# Altium PCB USB_Serial_Interface.PcbDoc
Units mm, origin at the board's own origin, x right, y up, seen from the top; angles counter-clockwise.
Board outline 45.7 x 28.37 mm, 2 copper layers (Top Layer, Bottom Layer); 35 components, 26 nets, 117 pads, 23 vias.
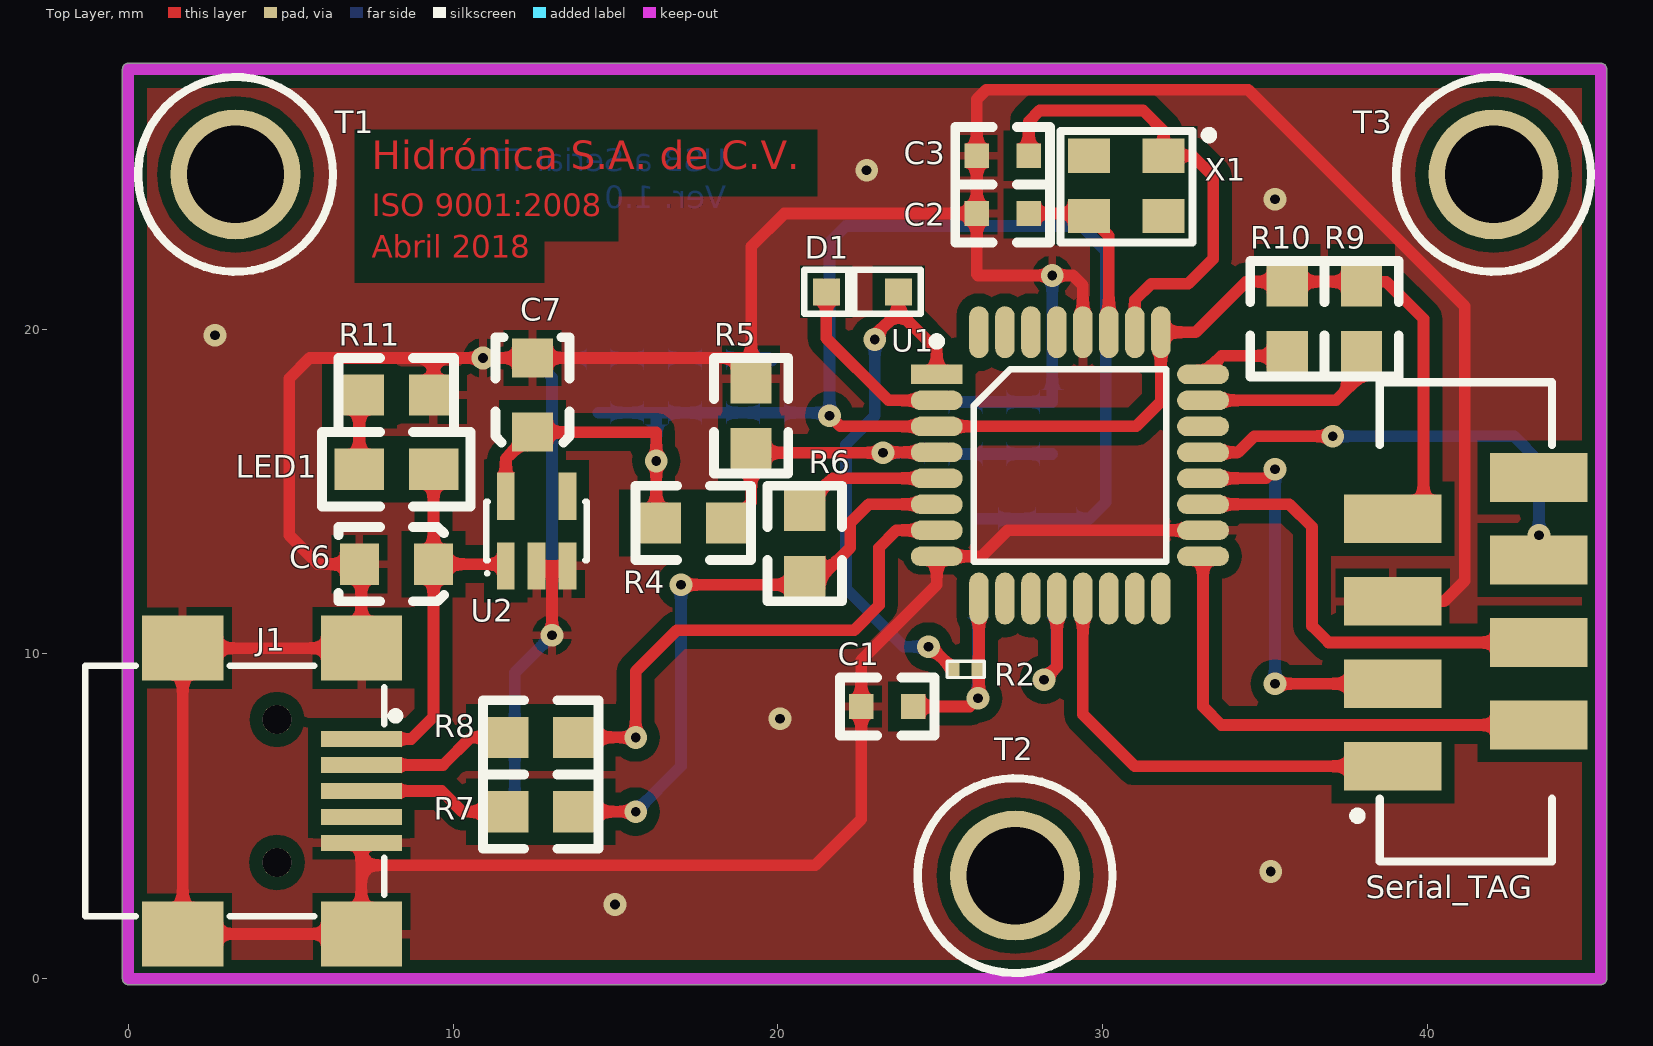
[diagram p0: Top Layer view]
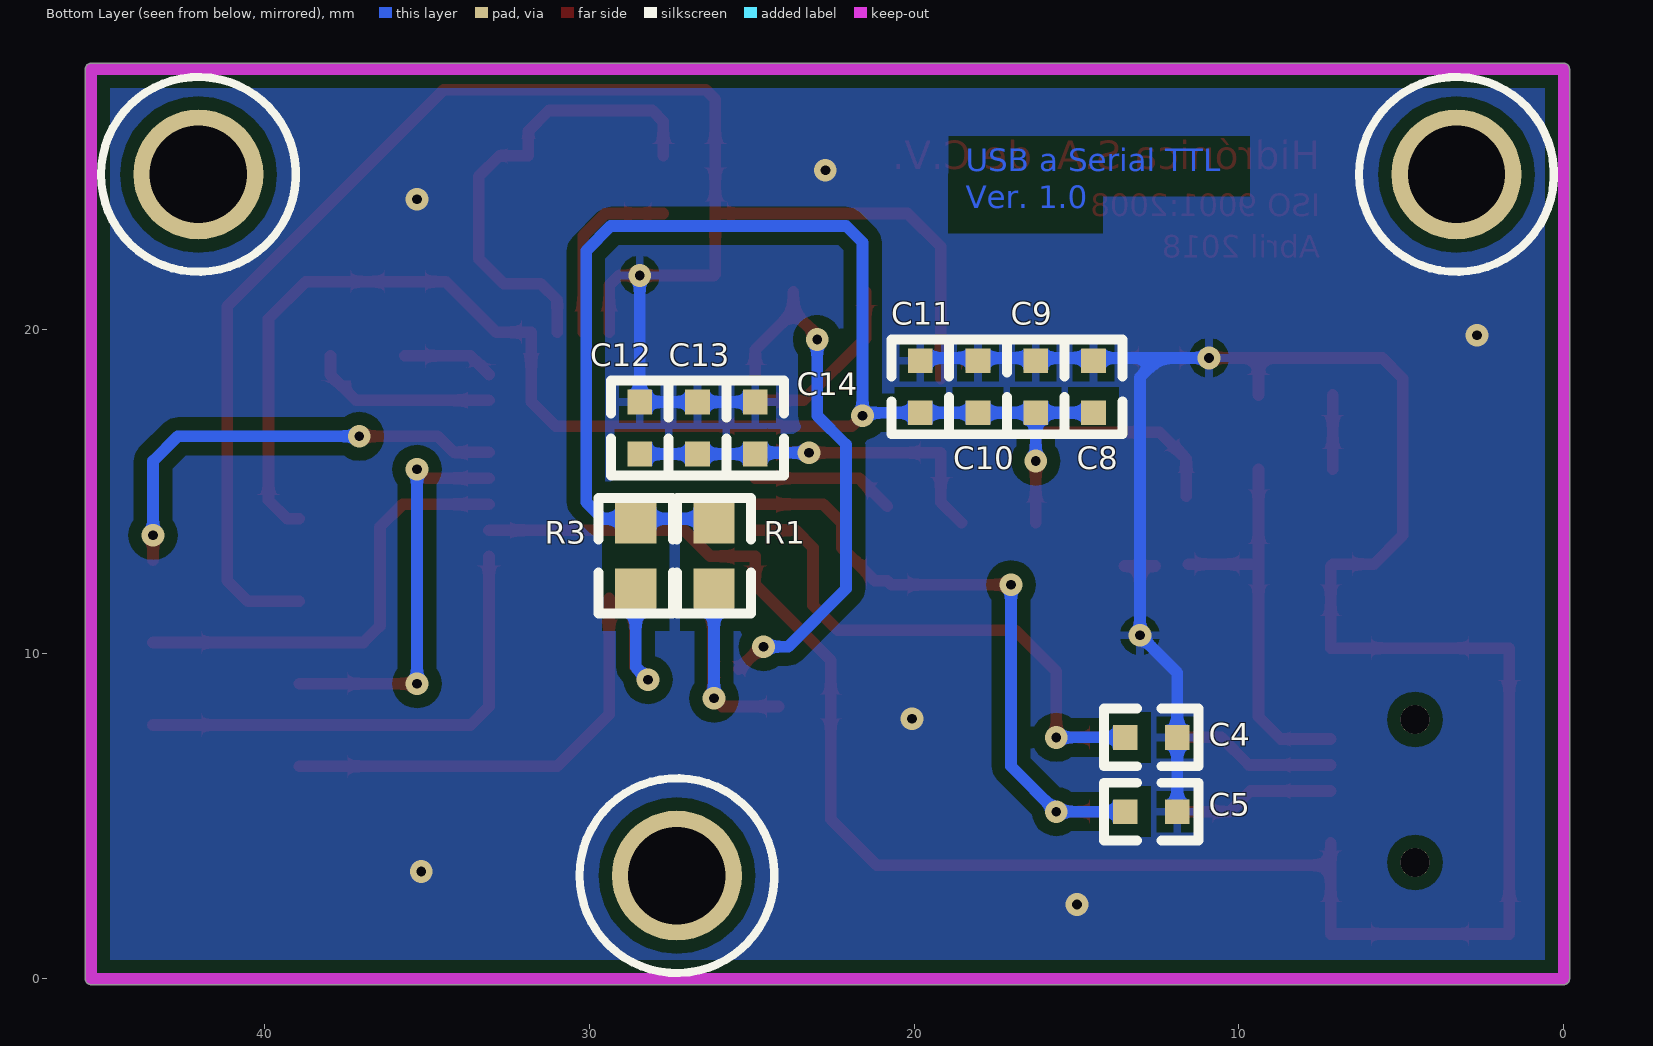
[diagram p1: Bottom Layer view, seen from below]
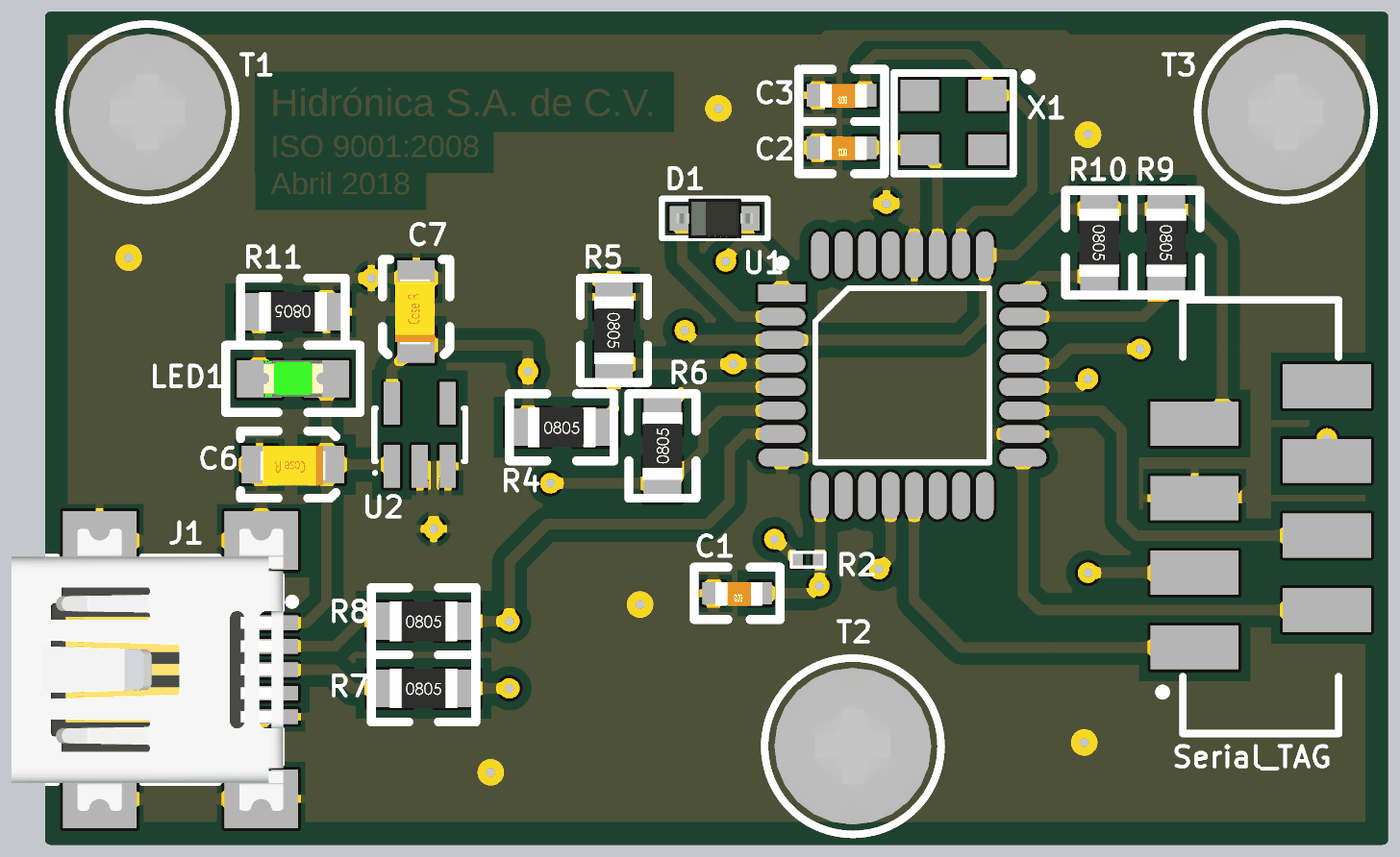
[diagram p2: 3D render of the assembled board from above, using the file's embedded part models]
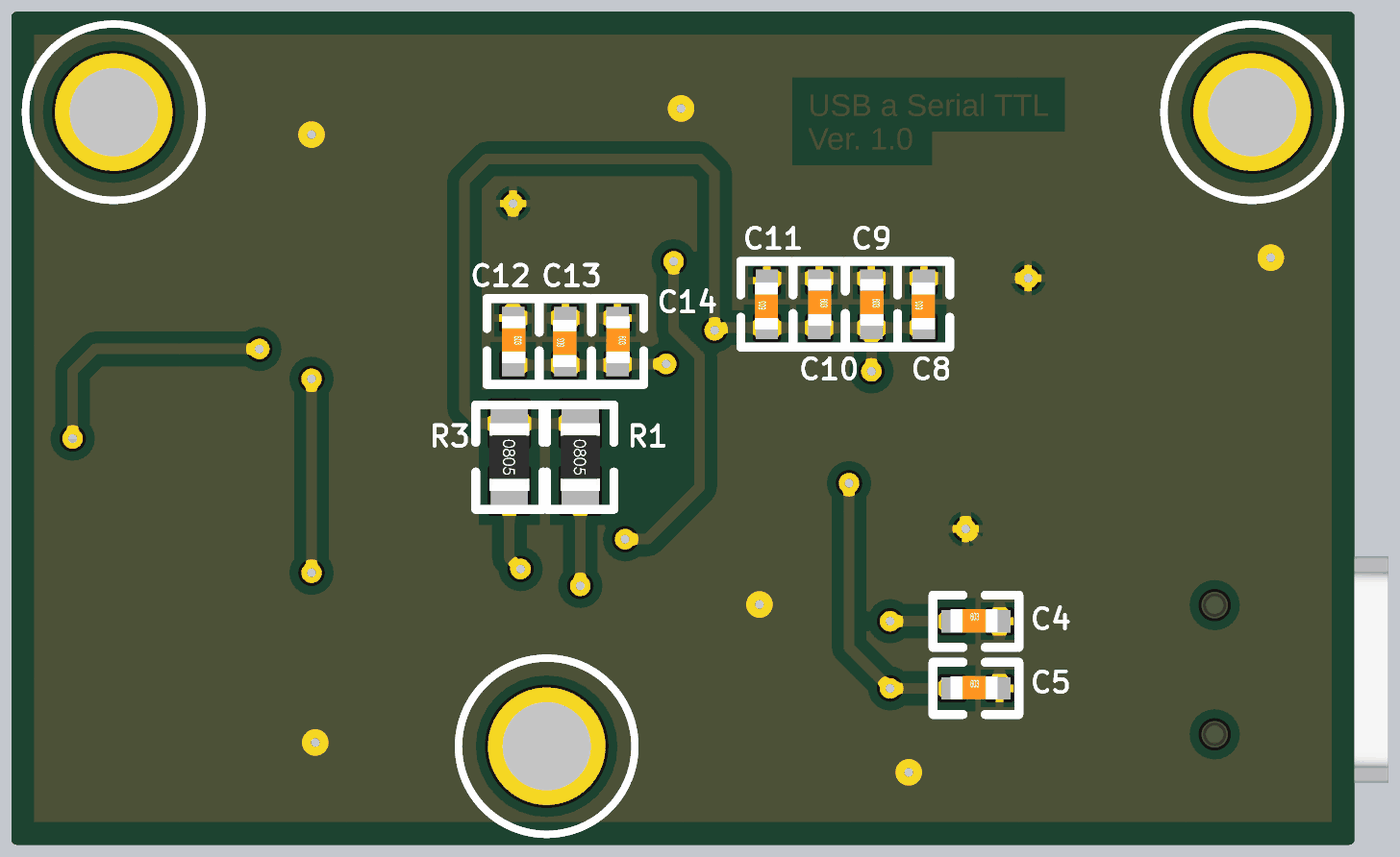
[diagram p3: 3D render of the assembled board from below, using the file's embedded part models]

## Layer stack, top to bottom
Top Solder: solder mask 0.0102, Solder Resist, Dk 3.5
Top Layer: signal copper 0.0356
Dielectric 1: dielectric 0.32, FR-4, Dk 4.8
Bottom Layer: signal copper 0.0356
Bottom Solder: solder mask 0.0102, Solder Resist, Dk 3.5

## Board outline
0,-0.18 cw(c0,0) -0.18,0 -0.18,28.005 cw(c0,28.005) 0,28.185 45.339,28.185 cw(c45.339,28.005) 45.519,28.005 45.519,0 cw(c45.339,0) 45.339,-0.18

## Design rules (kind name [scope] priority, off if disabled: settings)
Clearance [All] p1: gap=0.2
ComponentClearance [All] p1: gap=0.1 collisioncheckmode=3 verticalgap=0.254 showdistances=FALSE
PolygonConnect [All] p1: connectstyle=Relief reliefconductorwidth=0.254 reliefentries=4 polygonreliefangle="90 Angle" airgapwidth=0.254
RoutingVias [All] p1: holewidth=0.711 width=1.27 viastyle="Through Hole" minholewidth=0.711 minwidth=1.27 maxholewidth=0.711 maxwidth=1.27
SolderMaskExpansion [All] p1: expansion=0.102
Width [All] p1: maxlimit=0.5 minlimit=0.254 preferedwidth=0.36
29 further rules are at their usual default settings.

## Components (designator, comment, footprint, x,y, rotation, side; value= is the part's Value field where it differs from the comment)
C1 "0.1uF" "0603 - CAP" 23.368,8.382 r180 top
C2 "33pF" "0603 - CAP" 26.924,23.56 r180 top
C3 "33pF" "0603 - CAP" 26.924,25.338 r180 top
C4 "22pF" "0603 - CAP" 12.7,7.431 r180 bottom
C5 "22pF" "0603 - CAP" 12.7,5.145 r180 bottom
C6 "1uF" 0805-tan 9.398,12.765 r180 top
C7 "4.7uF" 0805-tan 12.446,16.829 r90 top
C8 "0.1uF" "0603 - CAP" 14.478,18.226 r90 bottom
C9 "0.01μF" "0603 - CAP" 16.256,18.226 r270 bottom
C10 "0.001μF" "0603 - CAP" 18.034,18.226 r270 bottom
C11 "0.1uF" "0603 - CAP" 19.812,18.226 r90 bottom
C12 "0.01μF" "0603 - CAP" 28.448,16.956 r270 bottom
C13 "0.1uF" "0603 - CAP" 26.67,16.956 r90 bottom
C14 "0.001μF" "0603 - CAP" 24.892,16.956 r270 bottom
D1 "NSR0320MW2T1G" SOD-323 22.606,21.147 r180 top
J1 "65100516121" 65100516121 3.302,5.78 r270 top
LED1 "LED1" 0805-LEDG 9.398,15.686 r180 top
R1 "Res Semi" 0805-RES 26.162,14.162 r270 bottom
R2 "32KΩ" 0402 25.781,9.525 r180 top
R3 "Res Semi" 0805-RES 28.575,14.162 r270 bottom
R4 "Res Semi" 0805-RES 16.256,14.035 r0 top
R5 "100KΩ" 0805-RES 19.177,18.48 r270 top
R6 "1.5KΩ" 0805-RES 20.828,12.257 r90 top
R7 "Res Semi" 0805-RES 11.557,5.145 r0 top
R8 "Res Semi" 0805-RES 11.557,7.431 r0 top
R9 "Res Semi" 0805-RES 37.973,21.463 r270 top
R10 "Res Semi" 0805-RES 35.687,21.463 r270 top
R11 "4.7KΩ" 0805-RES 9.398,17.972 r180 top
Serial_TAG "Header 4X2" 690367290876 38.862,6.542 r90 top
T1 "" Tornillo 3.302,24.765 r0 top
T2 "" Tornillo 27.305,3.175 r0 top
T3 "" Tornillo 42.037,24.765 r0 top
U1 "TUSB3410" QUAD32 24.892,18.607 r0 top
U2 "TPS76933DBVR" DBV005 12.573,13.781 r0 top
X1 "XTAL" "XTAL 4-SMD" 31.877,25.338 r180 top

## Footprints (in the part's own frame and the unit in brackets; to place one, negate y for a bottom-side part, rotate by r counter-clockwise, add the part's x,y. Pads: shape width x height; smd on the part's side, far side on the other; paste and mask are expansions set on the pad)
0402 [mm]
  rect 0.4x0.5 smd: 1(-0.375,0) 2(0.381,0)
  silkscreen extent -0.58,-0.25 0.58,0.25
"0603 - CAP" [mil]
  rect 30x30 smd: 1(-31.5,0) 2(31.5,0)
  silkscreen extent -58,-35 58,35, body extent -34,-15 29,16, height 12
0805-LEDG [mil]
  rect 60x50 smd: 1(0,0) 2(90,0)
  silkscreen extent -45,-45 135,45, body extent 5,-25 85,24
0805-RES [mil]
  rect 60x50 smd: 1(0,0) 2(90,0)
  silkscreen extent -25,-45 115,45, body extent 0,-27 90,27, height 30
0805-tan [mm]
  rect 1.2x1.27 smd: 1(0,0) 2(2.286,0)
  silkscreen extent -0.32,-1.14 2.92,1.14, body extent 0.02,-0.64 2.27,0.71, height 1.35
65100516121 [mm] "Mini USB 2.0 Type B SMT Horizontal 5 Contacts"
  rect 0.5x2.5 smd: 1(-1.6,3.875) 2(-0.8,3.875) 3(0,3.875) 4(0.8,3.875) 5(1.6,3.875)
  rect 2x2.5 smd: Shell(-4.4,3.875) Shell(-4.4,-1.625) Shell(4.4,3.875) Shell(4.4,-1.625)
  round 0.9 hole 0.9 unplated: ""(-2.2,1.275) ""(2.2,1.275)
  silkscreen extent -3.85,-4.62 3.85,5.04, body extent -4.8,-4.63 4.8,4.62, height 3.92
690367290876 [mm] "Würth Elektronic UDE Female SMD Stright Connector"
  rect 1.5x3 smd: 1(0,-0.072) 2(1.27,-4.572) 3(2.54,-0.072) 4(3.81,-4.572) 5(5.08,-0.072) 6(6.35,-4.572) 7(7.62,-0.072) 8(8.89,-4.572)
  silkscreen extent -2.94,-4.97 11.83,1.14
DBV005 [mm] "SOT-23/SC-74A; 5 Leads; Body 3 x 3 mm, inc. leads (LxW max)"
  rect 0.55x1.45 smd: 1(-0.95,-1.075) 2(0,-1.075) 3(0.95,-1.075) 4(0.95,1.075) 5(-0.95,1.075)
  silkscreen extent -1.57,-1.35 1.55,0.9
QUAD32 [mm]
  rect 1.6x0.6 smd: 1(0,0)
  oval 1.6x0.6 smd: 2(0,-0.8) 3(0,-1.6) 4(0,-2.4) 5(0,-3.2) 6(0,-4) 7(0,-4.8) 8(0,-5.6) 17(8.2,-5.6) 18(8.2,-4.8) 19(8.2,-4) 20(8.2,-3.2) 21(8.2,-2.4) 22(8.2,-1.6) 23(8.2,-0.8) 24(8.2,0)
  oval 0.6x1.6 smd: 9(1.3,-6.9) 10(2.1,-6.9) 11(2.9,-6.9) 12(3.7,-6.9) 13(4.5,-6.9) 14(5.3,-6.9) 15(6.1,-6.9) 16(6.9,-6.9) 25(6.9,1.3) 26(6.1,1.3) 27(5.3,1.3) 28(4.5,1.3) 29(3.7,1.3) 30(2.9,1.3) 31(2.1,1.3) 32(1.3,1.3)
  silkscreen extent -0.13,-5.77 7.07,1.14
SOD-323 [mm]
  rect 0.83x0.83 smd: 1(-1.112,0) 2(1.112,0)
  silkscreen extent -1.8,-0.67 1.8,0.67, body extent -1.3,-0.68 1.3,0.68, height 1.1
Tornillo [mm]
  round 4 hole 3 unplated: 1(0,0)
  silkscreen extent -3,-3 3,3, body extent -2.67,-2.67 2.67,2.67, height 2.01
"XTAL 4-SMD" [mm] "12MHz ±20ppm Crystal 18pF 250 Ohms 4-SMD"
  rect 1.3x1.05 smd: 1(0,0) 2(2.3,0) 3(2.3,1.85) 4(0,1.85)
  silkscreen extent -1.52,-0.76 3.17,2.67

## Part data
C1 C8 C11 C13: library part Cap, "CAP CERAMIC 0.1UF, 25V, X7R, 0603"
C2 C3: library part Cap, "CAP CER 33PF 100V C0G/NP0 0603"
C4 C5: library part Cap, "CAP CER 22PF 25V C0G/NP0 0603"
C6: library part "Cap Pol1", "CAP TANT 1UF 10V 10% 0805"
C7: library part "Cap Pol1", "CAP TANT 4.7UF 10V 10% 0805"
C9 C12: library part Cap, "CAP CER 10000PF 16V X7R 0603"
C10 C14: library part Cap, "CAP CER 1000PF 16V X7R 0603"
D1: library part 10MQ060N, "DIODE SCHOTTKY 1A 20V SOD-323"
J1: "Mini USB 2.0 Type B SMT Horizontal 5 Contacts WR-COM"
LED1: library part LED2, "WL-SMCW SMD mono-color chip LED waterclear 0805 Green"
R1: "RES SMD 15K OHM 0.1% 1/4W 0805"
R2: library part "Res Semi", "RES 32K OHM 0.1% 1/10W 0402"
R3 R9 R10: "10 kOhms ±5% 0.125W, 1/8W Chip Resistor 0805"
R4: "RES SMD 90.9K OHM 0.1% 1/8W 0805"
R5: library part Res1, "RES SMD 100K OHM 0.1% 1/8W 0805"
R6: library part "Res Semi", "RES SMD 1.5K OHM 5% 0.4W 0805"
R7 R8: "RES SMD 33 OHM 1% 1/8W 0805"
R11: library part Res1, "RES SMD 4.7K OHM 5% 1/8W 0805"
Serial_TAG: "Female SMT Straight Connector with Latch and with Polarization WR-MM 8-Pin"
T1 T2 T3: library part PRUEBA, "No Aplica"
U2: library part TPS76933, "Linear Voltage Regulator IC Positive Fixed 1 Output 3.3V 100mA SOT-23-5"
X1: "CRYSTAL 12.0000MHZ 18PF SMD"

## Via types
v1: diameter 0.7, hole 0.3, Top Layer to Bottom Layer, 23 vias

## Nets (pads, with @x,y where several pads share a name; then routed paths per layer and width w, separated by ;. In a path a pad name is that pad's centre, name@x,y a point inside that pad or via, vN(x,y) a via of type N, cw(c..) or ccw(c..) an arc to the next point about the centre after c; other vN are vias at no path point)
1.8_VCC: C12.2 C13.1 C14.2 R4.2 R5.2 U1.4 | length 13.3
  Top Layer w0.36: R4.2 19.177,14.67 R5.2 v1(23.241,16.194) ; v1@23.254,16.207 U1.4
  Bottom Layer w0.36: v1(23.241,16.194) C14.2@24.854,16.194 ; C14.2 C13.1 C12.2
3.3V_USB: C7.1 C8.1 C9.2 C10.2 C11.1 R1.1 R3.1 R4.1 R9.1 R10.1 Serial_TAG.7 U1.3 U1.25 U2.5 | length 72.6
  Top Layer w0.36: U2.5 11.623,16.006 C7.1 16.256,16.829 v1(16.256,15.94) R4.1 ; v1(21.59,17.337) 21.92,17.007 U1.3 31.039,17.007 31.792,17.76 U1.25 32.861,19.907 34.417,21.463 R10.1 R9.1 38.735,21.463 39.878,20.32 39.878,14.732 39.308,14.162 Serial_TAG.7
  Bottom Layer w0.36: C8.1 C9.2 ; v1(16.256,15.94) C9.2 ; R1.1 R3.1 29.591,14.162 30.099,14.67 30.099,22.417 29.337,23.179 22.098,23.179 21.59,22.671 v1(21.59,17.337) 21.501,17.426 C11.1 C10.2 C9.2
5.0_VCC: C6.1 J1.1 LED1.1 U2.1 | length 12.3
  Top Layer w0.36: J1.1 8.712,7.38 9.398,8.066 C6.1 ; LED1.1 C6.1 ; U2.1@11.564,12.765 C6.1
GND: C1.2 C2.2 C3.2 C4.2 C5.2 C6.2 C7.2 C8.2 C9.1 C10.1 C11.2 C12.1 C13.2 C14.1 J1.5 J1.Shell R5.1 R11.1 Serial_TAG.5 U1.8 U1.18 U1.28 U2.2 U2.3 | length 166.4
  Top Layer w0.36: J1.5 7.177,3.494 ; R11.1 9.398,19.115 ; U2.2 13.048,12.706 ; v1(13.048,10.573) 13.048,12.706 ; U2.3 13.048,12.706 ; R5.1 R5.1@19.177,19.115 ; U1.28 29.392,21.346 29.083,21.655 v1(28.448,21.655) 26.162,21.655 26.124,21.693 C2.2 ; U1.18 27.077,13.807 26.277,13.007 U1.8 24.892,12.13 22.568,9.806 C1.2 22.568,4.915 21.147,3.494 7.177,3.494 ; Serial_TAG.5 40.513,11.622 41.148,12.257 41.148,20.701 34.479,27.37 26.416,27.37 26.124,27.078 C3.2 C2.2 ; 7.177,3.494 7.177,1.38 1.677,1.38 1.677,10.18 7.177,10.18 7.177,12.7 C6.2 5.842,12.765 4.953,13.654 4.953,18.48 5.588,19.115 9.398,19.115 ; 9.398,19.115 v1(10.922,19.115) C7.2 R5.1@19.177,19.115 ; R5.1@19.177,19.115 19.177,22.544 20.193,23.56 C2.2
  Bottom Layer w0.36: v1(10.922,19.115) 12.446,19.115 ; C5.2 C4.2 11.9,9.425 v1(13.048,10.573) 13.048,18.513 12.446,19.115 ; C11.2 19.723,19.115 12.446,19.115 ; C14.1 C13.2 C12.1 v1(28.448,21.655)
  other v1: 14.986,2.286 35.179,3.302 20.066,8.001 2.667,19.812 35.306,24.003 22.733,24.892
NetC1_1: C1.1 R1.2 R2.1 U1.9 | length 8.4
  Top Layer w0.36: C1.1 25.908,8.382 v1(26.162,8.636) 26.192,8.666 U1.9
  Bottom Layer w0.36: v1(26.162,8.636) R1.2
NetC2_1: C2.1 U1.27 X1.3 | length 5.6
  Top Layer w0.36: C2.1 X1.3@29.505,23.56 ; X1.3 30.192,22.873 U1.27
NetC3_1: C3.1 U1.26 X1.1 | length 14.6
  Top Layer w0.36: C3.1 27.724,26.392 28.067,26.735 31.242,26.735 31.877,26.1 X1.1 32.766,25.338 33.401,24.703 33.401,22.163 32.639,21.401 31.496,21.401 30.992,20.897 U1.26
NetC4_1: C4.1 R8.2 U1.7 | length 18
  Top Layer w0.36: R8.2 v1(15.621,7.431) 15.621,9.463 16.891,10.733 22.352,10.733 23.114,11.495 23.114,13.273 23.648,13.807 U1.7
  Bottom Layer w0.36: C4.1 v1(15.621,7.431)
NetC5_1: C5.1 R6.1 R7.2 U1.6 | length 20.8
  Top Layer w0.36: R7.2 v1(15.621,5.145) ; v1(17.018,12.13) 20.701,12.13 R6.1 21.209,12.257 22.225,13.273 22.225,14.035 22.797,14.607 U1.6
  Bottom Layer w0.36: C5.1 v1(15.621,5.145) 17.018,6.542 v1(17.018,12.13)
NetD1_1: D1.1 R2.2 U1.1 | length 16.6
  Top Layer w0.36: v1(22.987,19.685) 22.987,19.811 23.718,20.542 ; D1.1 23.718,20.542 ; v1(24.638,10.225) 24.7,10.225 R2.2 ; U1.1 24.892,19.369 23.718,20.542
  Bottom Layer w0.36: v1(22.987,19.685) 22.987,17.337 22.098,16.448 22.098,12.003 23.876,10.225 v1(24.638,10.225)
NetD1_2: D1.2 U1.2 | length 5.6
  Top Layer w0.36: D1.2 21.494,19.719 23.406,17.807 U1.2
NetJ1_2: J1.2 R8.1 | length 4.7
  Top Layer w0.36: J1.2 9.69,6.58 10.541,7.431 R8.1
NetJ1_3: J1.3 R7.1 | length 4.6
  Top Layer w0.36: J1.3 9.652,5.78 10.287,5.145 R7.1
NetLED1_2: LED1.2 R11.2 | length 2.3
  Top Layer w0.36: LED1.2 R11.2
NetR3_2: R3.2 U1.12 | length 5.5
  Top Layer w0.36: v1(28.194,9.209) 28.592,9.607 U1.12
  Bottom Layer w0.36: v1(28.194,9.209) 28.575,9.59 R3.2
NetR6_2: R6.2 U1.5 | length 4.4
  Top Layer w0.36: R6.2 21.692,15.407 U1.5
NetR9_2: R9.2 U1.23 | length 5.8
  Top Layer w0.36: U1.23 37.184,17.807 37.973,18.596 R9.2
NetR10_2: R10.2 U1.24 | length 2.8
  Top Layer w0.36: U1.24 33.662,19.177 R10.2
NetSP1_1: T1.1
NetSP2_1: T2.1
NetSP3_1: T3.1
USB3410_CTS: Serial_TAG.1 U1.13 | length 13.8
  Top Layer w0.36: U1.13 29.392,8.138 30.988,6.542 Serial_TAG.1
USB3410_DTR: Serial_TAG.6 U1.21 | length 13.9
  Top Layer w0.36: U1.21 34.176,16.207 34.671,16.702 v1(37.084,16.702) ; Serial_TAG.6 v1(43.434,13.654)
  Bottom Layer w0.36: v1(37.084,16.702) 42.672,16.702 43.434,15.94 v1(43.434,13.654)
USB3410_RTS: Serial_TAG.3 U1.20 | length 12.6
  Top Layer w0.36: U1.20 35.027,15.407 v1(35.306,15.686) ; v1(35.306,9.082) Serial_TAG.3
  Bottom Layer w0.36: v1(35.306,9.082) v1(35.306,15.686)
USB3410_RX: Serial_TAG.2 U1.17 | length 15.2
  Top Layer w0.36: U1.17 33.092,8.375 33.655,7.812 Serial_TAG.2
USB3410_TX: Serial_TAG.4 U1.19 | length 13.9
  Top Layer w0.36: U1.19 35.75,14.607 36.449,13.908 36.449,10.86 36.957,10.352 Serial_TAG.4
pads on no net: J1. J1.4 Serial_TAG.8 U1.10 U1.11 U1.14 U1.15 U1.16 U1.22 U1.29 U1.30 U1.31 U1.32 U2.4 X1.2 X1.4

## Polygon pours and split planes (outlines as drawn)
GND on Top Layer "Top Layer-No Net" (solid, remove dead copper, pour order 4): 0,28.005 45.339,28.005 45.339,0 0,0 0,28.005
GND on Bottom Layer "Top Layer-No Net" (solid, remove dead copper, pour order 3): 0,28.005 45.339,28.005 45.339,0 0,0 0,28.005

## Keep-outs
Keep-Out Layer:
  lines w0.36: 0,0 0,28.005 45.339,28.005 45.339,0 0,0

## Other copper
Top Layer:
  text "Hidrónica S.A. de C.V." at 7.493,24.638 h1.5
  text "ISO 9001:2008" at 7.493,23.241 h1.2
  text "Abril 2018" at 7.493,21.971 h1.2
Bottom Layer:
  text "USB a Serial TTL" at 18.415,24.638 h1.2
  text "Ver. 1.0" at 18.415,23.495 h1.2